# Altium PCB board_1_ver2.PcbDoc
Units mil, origin at the board's own origin, x right, y up, seen from the top; angles counter-clockwise.
Board outline 3543.31 x 1968.5 mil, 2 copper layers (Top Layer, Bottom Layer); 85 components, 75 nets, 306 pads, 106 vias.
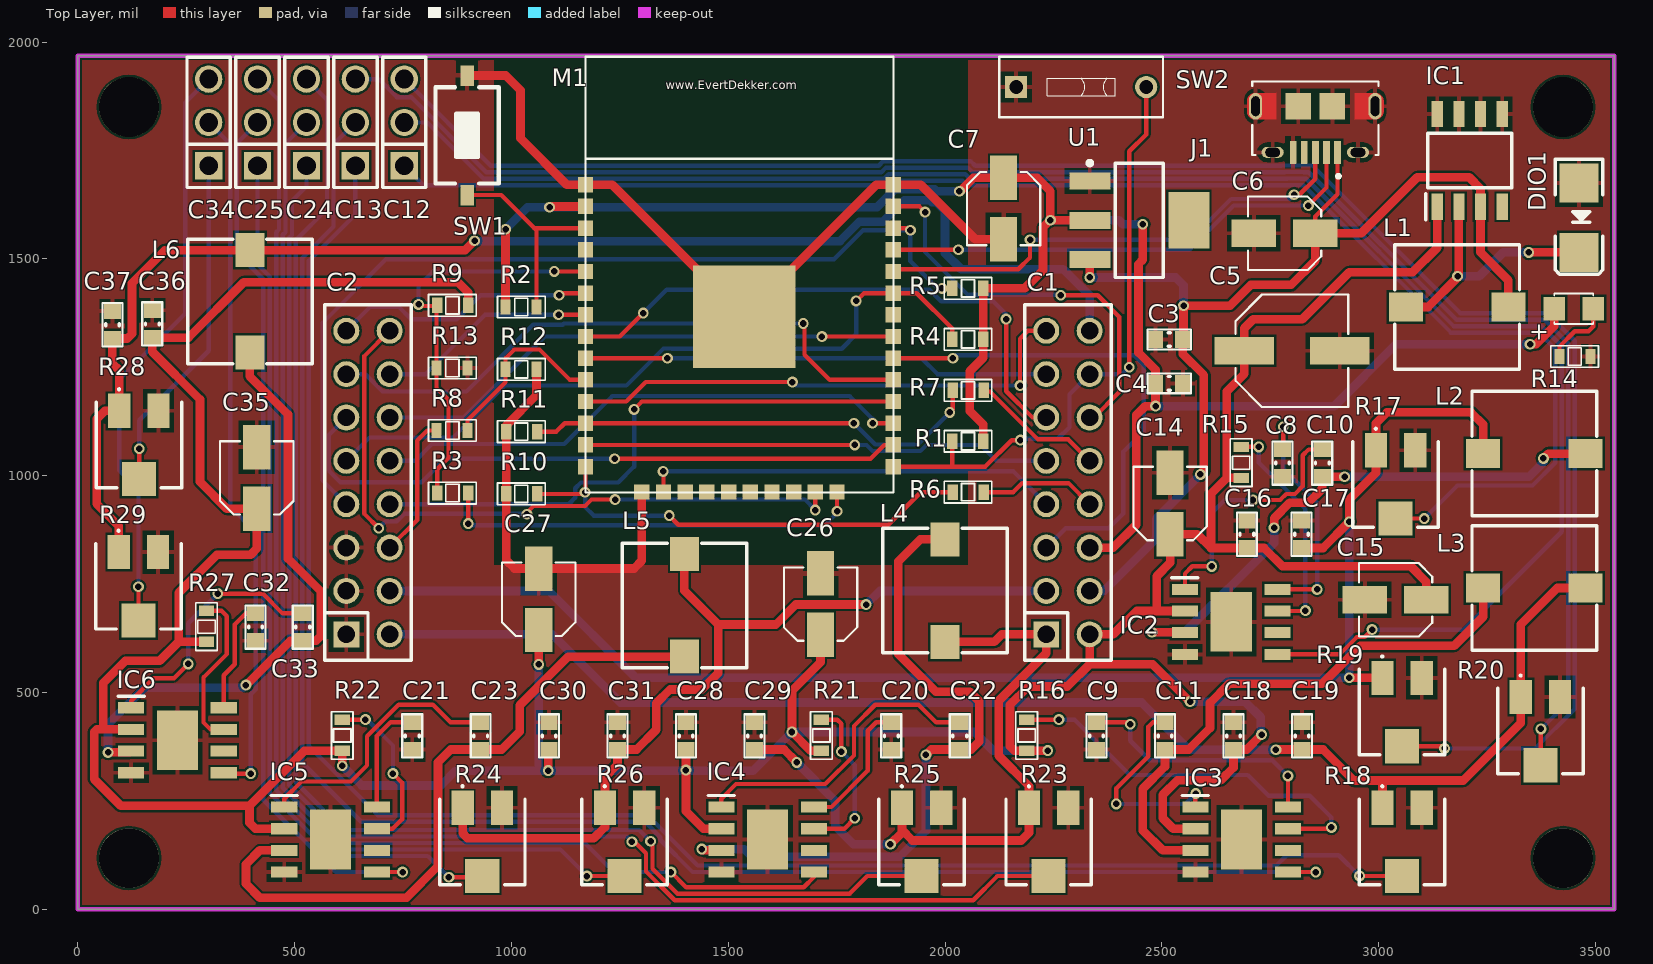
[diagram p0: Top Layer view]
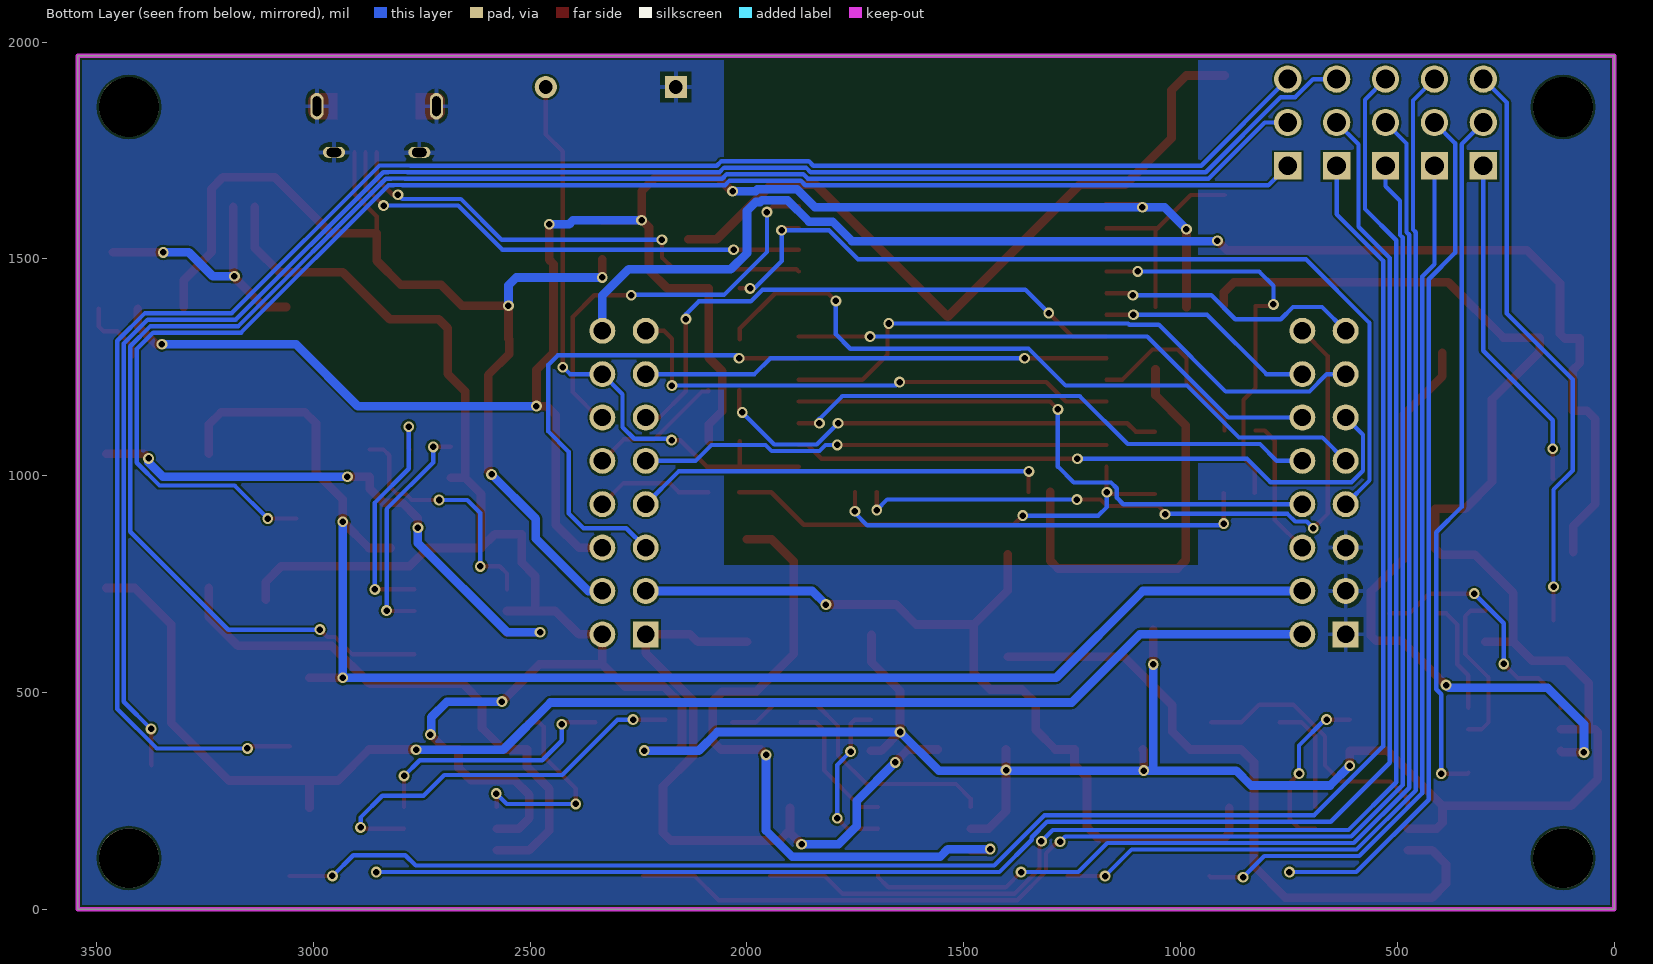
[diagram p1: Bottom Layer view, seen from below]
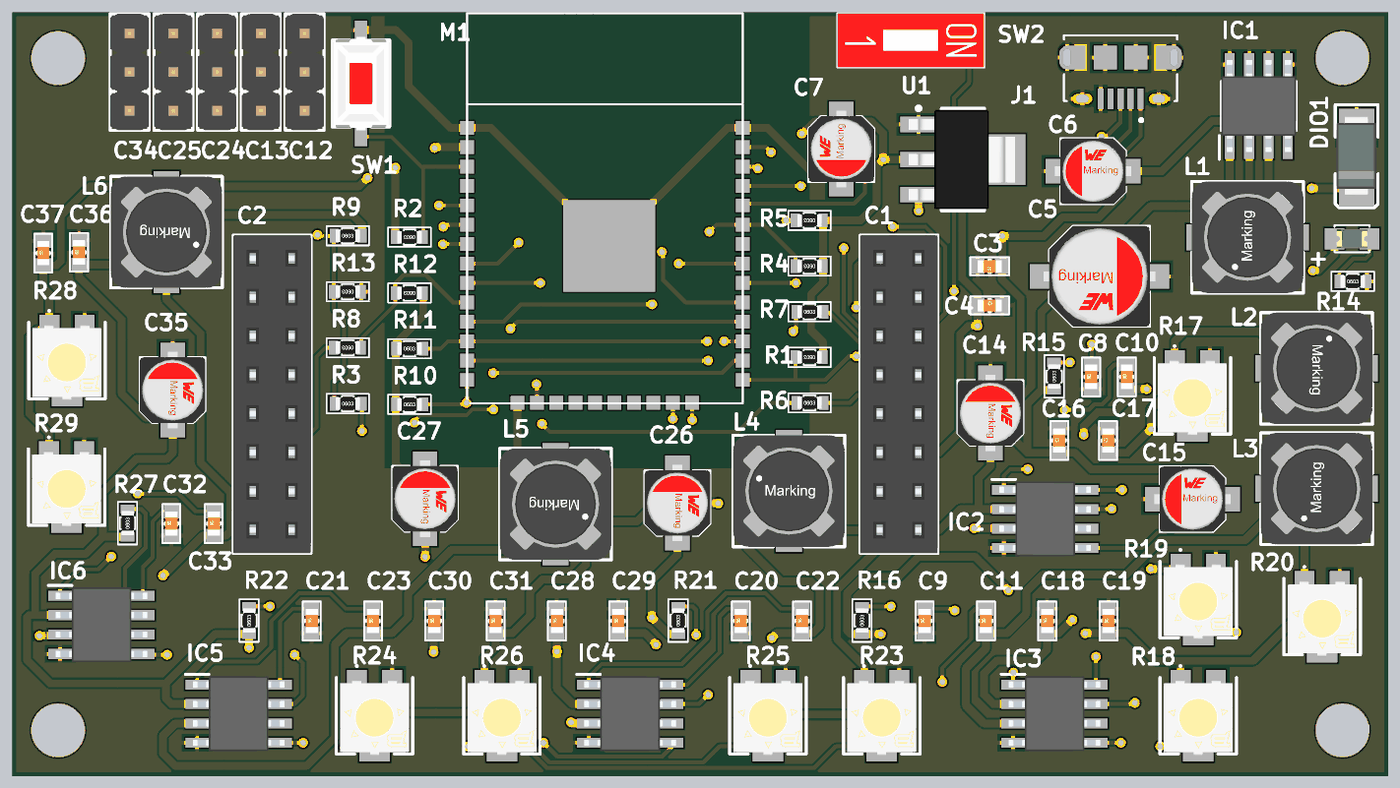
[diagram p2: 3D render of the assembled board from above, using the file's embedded part models]

## Layer stack, top to bottom
Top Solder: solder mask 0.4, Solder Resist, Dk 3.5
Top Layer: signal copper 1.4
Dielectric 1: dielectric 12.6, FR-4, Dk 4.8
Bottom Layer: signal copper 1.4
Bottom Solder: solder mask 0.4, Solder Resist, Dk 3.5

## Board outline
0,0 3543.31,0 3543.31,1968.5 0,1968.5

## Design rules (kind name [scope] priority, off if disabled: settings)
Clearance [All] p1: gap=5
PolygonConnect [All] p1: connectstyle=Relief reliefconductorwidth=10 reliefentries=4 polygonreliefangle="90 Angle" airgapwidth=10
RoomDefinition power [InComponentClass('power')] p1: confinementstyle=ConfineIn formatcopy=TRUE lockcomponents=FALSE outline 3589,1243 6248,1243 6248,1729 3589,1729
RoomDefinition esp32 [InComponentClass('esp32')] p2: confinementstyle=ConfineIn formatcopy=TRUE lockcomponents=FALSE outline 3589,55 7698,55 7698,1194 3589,1194
RoutingVias [All] p1: holewidth=15 width=25 viastyle="Through Hole" minholewidth=15 minwidth=25 maxholewidth=28 maxwidth=50
SolderMaskExpansion [All] p1: expansion=4
Width [All] p1: maxlimit=100 minlimit=6 preferedwidth=10
30 further rules are at their usual default settings.

## Classes and differential pairs
component class esp32: C1 C2 J1 M1 R1 R2 R3 R4 R5 R6 R7 R8 R9 R10 R11 R12 R13 SW1 SW2
component class power: + C3 C4 C5 C6 C7 DIO1 IC1 IC3 L1 R14 U1 U2 U3 U4

## Components (designator, comment, footprint, x,y, rotation, side; value= is the part's Value field where it differs from the comment)
+ "LED" LED-0805-Blue 3405,1385 r0 top (schematic designator LED1)
C1 "JP8x2" JP8-C2T 2283.46,984.25 r90 top locked
C2 "JP8x2" JP8-C2T 669.29,984.25 r90 top locked
C3 "10uF" CN-SMD-0603 2517,1314 r180 top
C4 "10uF" CN-SMD-0603 2517,1213 r0 top
C5 "470uF" CAP-ALU-SMD-6.3x7.7x2.2 2800,1288 r0 top
C6 "CN-ALU-SMD" CAP-ALU-SMD-4.5x5x1.4 2783,1559 r180 top
C7 "CN-ALU-SMD" CAP-ALU-SMD-4.5x5x1.4 2135,1616 r270 top
C8 "0.1uF" CN-SMD-0603 2778.27,1029.01 r90 top
C9 "0.1uF" CN-SMD-0603 2349.54,400.01 r90 top
C10 "10nF" CN-SMD-0603 2870,1029.01 r90 top
C11 "10nF" CN-SMD-0603 2507.36,400.01 r90 top
C12 "JP3" JP3-D1T 753,1714.57 r90 top
C13 "JP3" JP3-D1T 640.25,1714.57 r90 top
C14 "CN-ALU-SMD" CAP-ALU-SMD-4.5x5x1.4 2519,936 r90 top
C15 "CN-ALU-SMD" CAP-ALU-SMD-4.5x5x1.4 3039,714 r180 top
C16 "10uF" CN-SMD-0603 2696,865 r90 top
C17 "10uF" CN-SMD-0603 2822,865 r90 top
C18 "10uF" CN-SMD-0603 2665.18,400.01 r90 top
C19 "10uF" CN-SMD-0603 2823,400.01 r90 top
C20 "0.1uF" CN-SMD-0603 1876.09,400.01 r90 top
C21 "0.1uF" CN-SMD-0603 771.36,400.01 r90 top
C22 "10nF" CN-SMD-0603 2033.91,400.01 r90 top
C23 "10nF" CN-SMD-0603 929.18,400.01 r90 top
C24 "JP3" JP3-D1T 527.5,1714.57 r90 top
C25 "JP3" JP3-D1T 414.75,1714.57 r90 top
C26 "CN-ALU-SMD" CAP-ALU-SMD-4.5x5x1.4 1713,704 r90 top
C27 "CN-ALU-SMD" CAP-ALU-SMD-4.5x5x1.4 1063,715 r90 top
C28 "10uF" CN-SMD-0603 1402.63,400.01 r90 top
C29 "10uF" CN-SMD-0603 1560.45,400.01 r90 top
C30 "10uF" CN-SMD-0603 1087,400.01 r90 top
C31 "10uF" CN-SMD-0603 1244.82,400.01 r90 top
C32 "0.1uF" CN-SMD-0603 409.77,651.01 r90 top
C33 "10nF" CN-SMD-0603 519,651.01 r90 top
C34 "JP3" JP3-D1T 302,1714.57 r90 top
C35 "CN-ALU-SMD" CAP-ALU-SMD-4.5x5x1.4 413,995 r90 top
C36 "10uF" CN-SMD-0603 172,1350 r90 top
C37 "10uF" CN-SMD-0603 80,1348 r90 top
DIO1 "SS34" DIO-SMD-106 3462,1595 r90 top
IC1 "XL1509-5.0E1" SOIC127P600X175-8N 3210,1727 r90 top
IC2 "FR9888SPGTR" SOIC127P600X170-9N 2660,663 r0 top
IC3 "FR9888SPGTR" SOIC127P600X170-9N 2684,161 r0 top
IC4 "FR9888SPGTR" SOIC127P600X170-9N 1591,161 r0 top
IC5 "FR9888SPGTR" SOIC127P600X170-9N 583,161 r0 top
IC6 "FR9888SPGTR" SOIC127P600X170-9N 230,390 r0 top
J1 "10118194-0001LF" AMPHENOL_10118194-0001LF 2854,1852 r180 top
L1 "1.0 μH" L-SMD-M-7.3x4.5 3181,1389 r270 top
L2 "1.0 μH" L-SMD-M-7.3x4.5 3359,1051 r90 top
L3 "1.0 μH" L-SMD-M-7.3x4.5 3359,741 r270 top
L4 "1.0 μH" L-SMD-M-7.3x4.5 2000,735 r180 top
L5 "1.0 μH" L-SMD-M-7.3x4.5 1399,701 r0 top
L6 "1.0 μH" L-SMD-M-7.3x4.5 397,1402 r0 top
M1 "ESP32S_Module" ESP32S 1171,961 r0 top
R1 "10K" RES-SMD-0603 2053,1079.5 r180 top
R2 "10K" RES-SMD-0603 1022.99,1389 r180 top
R3 "0R" RES-SMD-0603 864.01,960 r0 top
R4 "4K7" RES-SMD-0603 2053,1314.5 r180 top
R5 "4K7" RES-SMD-0603 2053,1432 r180 top
R6 "1K" RES-SMD-0603 2053.01,962 r0 top
R7 "1K" RES-SMD-0603 2053.01,1197 r0 top
R8 "1K" RES-SMD-0603 864,1104.25 r180 top
R9 "10K" RES-SMD-0603 864.01,1392.75 r0 top
R10 "2K" RES-SMD-0603 1023,958 r0 top
R11 "2K" RES-SMD-0603 1023,1101.67 r0 top
R12 "2K" RES-SMD-0603 1022.99,1245.33 r180 top
R13 "1K" RES-SMD-0603 864,1248.5 r180 top
R14 "1K" RES-SMD-0603 3452,1275 r0 top
R15 "100K" RES-SMD-0603 2683,1030 r90 top
R16 "100K" RES-SMD-0603 2188.18,401 r90 top
R17 "3314J-2-504E" 3314J-1 3039,980 r0 top
R18 "3314J-2-504E" 3314J-1 3054,155.54 r0 top
R19 "3314J-2-504E" 3314J-1 3054,455 r0 top
R20 "3314J-2-504E" 3314J-1 3373,411 r0 top
R21 "100K" RES-SMD-0603 1714.73,401 r90 top
R22 "100K" RES-SMD-0603 610,401 r90 top
R23 "3314J-2-504E" 3314J-1 2239,155.54 r0 top
R24 "3314J-2-504E" 3314J-1 933,155.54 r0 top
R25 "3314J-2-504E" 3314J-1 1946,155.54 r0 top
R26 "3314J-2-504E" 3314J-1 1261,155.54 r0 top
R27 "100K" RES-SMD-0603 297,652 r90 top
R28 "3314J-2-504E" 3314J-1 141,1071 r0 top
R29 "3314J-2-504E" 3314J-1 140,745 r0 top
SW1 "Reset" SW1-SMD 898,1785 r90 top
SW2 "Flash" SW-DIP1-1 2314,1896.32 r270 top
U1 "LM1117-3.3V" SOT223 2448,1589 r270 top

## Footprints (in the part's own frame and the unit in brackets; to place one, negate y for a bottom-side part, rotate by r counter-clockwise, add the part's x,y. Pads: shape width x height; smd on the part's side, far side on the other; paste and mask are expansions set on the pad)
3314J-1 [mm]
  rect 1.3x2 smd: 1(-1.15,2) 3(1.15,2)
  rect 2x2 smd: 2(0,-2)
  silkscreen extent -2.5,-2.5 2.5,3.28, body extent -2.25,-2.61 2.25,2.36, height 2.55
AMPHENOL_10118194-0001LF [mm]
  rect 0.4x1.35 smd: 1(-1.3,2.7) 2(-0.65,2.7) 3(0,2.7) 4(0.65,2.7) 5(1.3,2.7)
  oval 1.3x0.65 hole 0.55 slot 0.85 at 0 deg: S1(-2.5,2.7) S2(2.5,2.7)
  oval 0.775x1.55 hole 0.5 slot 1.15 at 90 deg: S3(-3.5,0) S6(3.5,0)
  rect 1.5x1.55 smd: S4(-1,0) S5(1,0)
  Top Layer region: 193 vertices and 0 holes, not listed, extent -4,-0.775 -2.3,0.78
  Top Layer region: 193 vertices and 0 holes, not listed, extent 2.3,-0.78 4,0.775
  silkscreen extent -3.7,-1.45 3.7,4.2
CAP-ALU-SMD-4.5x5x1.4 [mm]
  rect 2.6x1.6 smd: 1(-1.8,0) 2(1.8,0)
  silkscreen extent -2.15,-2.15 2.15,2.15, body extent -2.5,-2.15 2.5,2.15, height 5.45
CAP-ALU-SMD-6.3x7.7x2.2 [mm]
  rect 3.5x1.6 smd: 1(-2.8,0) 2(2.8,0)
  silkscreen extent -3.3,-3.3 3.3,3.3, body extent -3.65,-3.3 3.65,3.3, height 7.65
CN-SMD-0603 [mm]
  rect 0.9x1 smd: 1(-0.8,0) 2(0.8,0)
  silkscreen extent -1.27,-0.58 1.27,0.58, body extent -0.8,-0.4 0.8,0.4, height 0.3
DIO-SMD-106 [mil]
  rect 90x90.55 smd: 1(80,0) 2(-80,0)
  silkscreen extent -130,-55 135,55, body extent -99,-50 106,52, height 95
ESP32S [mm] "ESP32S-Module"
  rect 0.9x0.9 smd: 1(0,18.034) 2(0,16.764) 3(0,15.494) 4(0,14.224) 5(0,12.954) 6(0,11.684) 7(0,10.414) 8(0,9.144) 9(0,7.874) 10(0,6.604) 11(0,5.334) 12(0,4.064) 13(0,2.794) 14(0,1.524) 15(3.3,0.034) 16(4.57,0.034) 17(5.84,0.034) 18(7.11,0.034) 19(8.38,0.034) 20(9.65,0.034) 21(10.92,0.034) 22(12.19,0.034) 23(13.46,0.034) 24(14.73,0.034) 25(18.034,1.524) 26(18.034,2.794) 27(18.034,4.064) 28(18.034,5.334) 29(18.034,6.604) 30(18.034,7.874) 31(18.034,9.144) 32(18.034,10.414) 33(18.034,11.684) 34(18.034,12.954) 35(18.034,14.224) 36(18.034,15.494) 37(18.034,16.764) 38(18.034,18.034)
  rect 6x6 smd: 101(9.3,10.3)
  silkscreen extent 0,0 18.03,25.53, body extent 0,0 18.03,25.53, height 2
JP3-D1T [mm] "3 pins, 1 row, straight, gold plating"
  rect 1.6x1.6 hole 1.1: 1(0,0)
  round 1.6 hole 1.1: 2(2.54,0) 3(5.08,0)
  silkscreen extent -1.27,-1.27 6.35,1.27, body extent -1.27,-1.27 6.35,1.27, height 8.54
JP8-C2T [mm] "16 pins, dual row, straight, gold plating"
  rect 1.52x1.52 hole 1.02: 1(-8.89,1.27)
  round 1.52 hole 1.02: 2(-6.35,1.27) 3(-3.81,1.27) 4(-1.27,1.27) 5(1.27,1.27) 6(3.81,1.27) 7(6.35,1.27) 8(8.89,1.27) 9(8.89,-1.27) 10(6.35,-1.27) 11(3.81,-1.27) 12(1.27,-1.27) 13(-1.27,-1.27) 14(-3.81,-1.27) 15(-6.35,-1.27) 16(-8.89,-1.27)
  silkscreen extent -10.41,-2.54 10.41,2.54, body extent -10.41,-2.54 10.41,2.54, height 8.51
L-SMD-M-7.3x4.5 [mm] "WE-PDA SMD Shielded Power Inductor, 7345"
  rect 1.7x2 smd: 1(0,3) 2(0,-3)
  silkscreen extent -3.65,-3.65 3.65,3.65, body extent -3.65,-3.65 3.65,3.65, height 4.05
LED-0805-Blue [mil]
  rect 50x55 smd: 1(0,0) 2(90,0)
  silkscreen extent 0,-35 90,35, body extent 5,-25 85,25, height 43
RES-SMD-0603 [mm]
  rect 0.6x0.9 smd: 1(-0.889,0) 2(0.927,0)
  silkscreen extent -1.4,-0.64 1.4,0.64, body extent -0.8,-0.4 0.8,0.4, height 0.43
SOIC127P600X170-9N [mm]
  rect 1.525x0.65 smd: 1(-2.712,1.905) 2(-2.712,0.635) 3(-2.712,-0.635) 4(-2.712,-1.905) 5(2.712,-1.905) 6(2.712,-0.635) 7(2.712,0.635) 8(2.712,1.905)
  rect 2.41x3.5 smd: 9(0,0)
  silkscreen extent -3.47,2.58 -1.95,2.58, body extent -3,-2.45 3,2.45, height 1.7
SOIC127P600X175-8N [mm]
  rect 1.525x0.65 smd: 1(-2.712,1.905) 2(-2.712,0.635) 3(-2.712,-0.635) 4(-2.712,-1.905) 5(2.712,-1.905) 6(2.712,-0.635) 7(2.712,0.635) 8(2.712,1.905)
  silkscreen extent -3.47,-2.45 1.6,2.58, body extent -3,-2.45 3,2.45, height 1.75
SOT223 [mm]
  rect 1x2.4 smd: 1(-2.3,-2.9) 2(0,-2.9) 3(2.3,-2.9)
  rect 3.3x2.4 smd: 4(0,2.9)
  silkscreen extent -3.47,-3.02 3.35,1.4, body extent -3.25,-3.56 3.25,3.4, height 1.68
SW1-SMD [mm]
  rect 1.2x0.8 smd: 1(-3.5,0) 2(3.5,0)
  silkscreen extent -2.82,-1.85 2.82,1.85, body extent -3.05,-1.85 3.05,1.85, height 2.5
SW-DIP1-1 [mm] "01p, 2.54mm Pitch, Horizontal, Box Type, THT, flat Actuator, red, without Tape, Tube"
  rect 1.3x1.3 hole 0.8: 1(0,-3.81)
  round 1.3 hole 0.8: 2(0,3.81)
  silkscreen extent -1.77,-4.8 1.77,4.8, body extent -1.77,-4.8 1.77,4.8, height 5.4

## Part data
+: library part "LED SMD"
C1 C2: "WR-PHD 2.54 mm Dual Socket Header"
C3 C4 C8 C9 C10 C11 C16 C17 C18 C19 C20 C21 C22 C23 C28 C29 C30 C31 C32 C33 C36 C37: library part CN, "Tu gom"
C5: library part CN-ALU-SMD, "Polarized Capacitor (Axial)"
C6 C7 C14 C15 C26 C27 C35: "Polarized Capacitor (Axial)"
C12 C13 C24 C25 C34: "WR-PHD 2.54 mm Angled Socket Header"
DIO1: library part "Diode SMD", "Default Diode"
IC1 IC2 IC3 IC4 IC5 IC6: "Integrated Circuit"
J1: "USB - micro B USB 2.0 Receptacle Connector 5 Position Surface Mount, Right Angle; Through Hole"
L1 L2 L3 L4 L5 L6: library part L-SMD-1
M1: "Esp-32S"
R1 R2 R3 R4 R5 R6 R7 R8 R9 R10 R11 R12 R13 R14 R15 R16 R21 R22 R27: library part Res-SMD, "Resistor"
R17 R18 R19 R20 R23 R24 R25 R26 R28 R29: "Resistor"
SW1 SW2: library part SW2, "Switch button 2 pin"
U1: library part LM1117, "800mA Low-Dropout Linear Regulator"

## Free pads (board coordinates)
  round 137.8 hole 137.8: 0(118.11,118.11) 0(118.11,1850.39) 0(3425.2,118.11) 0(3425.2,1850.39)

## Via types
v1: diameter 25, hole 15, Top Layer to Bottom Layer, 106 vias

## Nets (pads, with @x,y where several pads share a name; then routed paths per layer and width w, separated by ;. In a path a pad name is that pad's centre, name@x,y a point inside that pad or via, vN(x,y) a via of type N, cw(c..) or ccw(c..) an arc to the next point about the centre after c; other vN are vias at no path point)
3V3: +.1 C1.14 C4.1 C7.1 M1.2 R1.1 R2.2 R4.1 R5.1 U1.2 | length 4527.4
  Top Layer w20: R2.2 v1(986.51,1568.51) ; v1(1088,1619) 1090,1621 M1.2 ; v1(2033,1656) 2035,1656 2065.87,1686.87 C7.1 2212.13,1686.87 2243,1656 v1(2243,1589) ; R1.1 2088,1118 2057,1149 2057,1241 2088,1272 R4.1 R5.1 2184,1432 2226,1474 2226,1573 2242,1589 v1(2243,1589) ; C1.14 2388.25,834.25 2441,887 2441,1140 2461.5,1160.5 v1(2485.5,1160.5) C4.1 2485.5,1244.5 2446,1284 2446,1488 2456,1498 v1(2456,1580) ; U1.2 v1(2243,1589) ; v1(3349,1303) 3363,1303 3405,1345 +.1
  Bottom Layer w20: v1(986.51,1568.51) 1037,1619 v1(1088,1619) 1843,1619 1884.5,1660.5 1975.75,1660.5 1980.25,1656 v1(2033,1656) ; v1(2243,1589) 2401,1589 2410,1580 v1(2456,1580) ; v1(2485.5,1160.5) 2897.5,1160.5 3040,1303 v1(3349,1303)
5V: C1.15 C3.1 C6.1 IC1.3 J1.1 L1.1 U1.3 | length 2481.7
  Top Layer w10: C6.1 2853.87,1597.87 2905.18,1649.18 J1.1
  Top Layer w20: v1(2333.83,1457.17) U1.3 ; v1(2589,1003) 2597,1011 2597,1232 2548.5,1280.5 C3.1 2550,1315.5 v1(2550,1392) 2657,1392 2705,1440 2798,1440 2853.87,1495.87 C6.1 2960,1559 3089,1688 3209,1688 3235,1662 IC1.3 3235,1515 3299.11,1450.89 L1.1
  Bottom Layer w20: C1.15 2366.25,734.25 2487,855 2487,901 v1(2589,1003) ; v1(2333.83,1457.17) 2531.83,1457.17 2550,1439 v1(2550,1392)
5V_1: C2.15 C17.1 L2.1 R17.1 R19.1 | length 3456.1
  Top Layer w20: C17.1 2871.5,833.5 v1(2932,894) 2932,945 2993.72,1006.72 R17.1 2993.72,1120.72 3019,1146 3213,1146 3240.89,1118.11 L2.1 ; v1(2932,534) 2932.26,533.74 R19.1
  Bottom Layer w20: C2.15 1086.75,734.25 1287,534 v1(2932,534) v1(2932,894)
5V_2: C2.16 C19.1 L3.1 R18.1 R20.1 | length 3277.6
  Top Layer w20: v1(2763,368) 2763.52,368.52 C19.1 2871.48,368.52 2942.72,297.28 3008.72,297.28 ; R18.1 3008.72,297.28 ; L3.1 3412,741 3327.72,656.72 R20.1 3327.72,429.72 3195.28,297.28 3008.72,297.28
  Bottom Layer w20: C2.16 1093.75,634.25 1251,477 2453,477 2562,368 v1(2763,368)
5V_3: C1.1 C29.1 L4.1 R23.1 R25.1 | length 1616.2
  Top Layer w20: C29.1 1628.48,368.52 v1(1658,339) ; v1(1874,150) 1900.72,176.72 1900.72,183.28 ; R25.1 1900.72,183.28 ; L4.1 2113.89,616.89 2131.25,634.25 C1.1 2233.46,590.46 2124,481 2124,354 2193.72,284.28 R23.1 2193.72,176.72 2176,159 1925,159 1900.72,183.28
  Bottom Layer w20: v1(1658,339) 1747,250 1747,192 1789,150 v1(1874,150)
5V_4: C1.2 C31.1 L5.1 R24.1 R26.1 | length 2029.1
  Top Layer w20: R24.1 887.72,175.28 899,164 1190,164 1215.72,189.72 R26.1 1215.72,304.72 1244.82,333.82 C31.1 1288.52,368.52 1334,414 1334,475 1366,507 1439,507 1477,545 1477,657 ; L5.1 1399,735 1477,657 ; v1(1818,703) 1656,703 1610,657 1477,657
  Bottom Layer w20: v1(1818,703) 1849.25,734.25 C1.2
5V_5: C1.9 C37.1 L6.1 R28.1 R29.1 | length 3245.7
  Top Layer w20: R29.1 94.72,884.28 44,935 44,1131 62.74,1149.74 R28.1 95.72,1243.28 80,1259 C37.1 114.5,1316.5 125,1327 125,1444 201.11,1520.11 L6.1 893.11,1520.11 v1(915,1542)
  Bottom Layer w20: v1(915,1542) 915.99,1541.01 1757.72,1541.01 1802.72,1586 1857,1586 1906.5,1635.5 1965.39,1635.5 1969.89,1631 1980,1631 2000,1611 2000,1513.11 2037.11,1476 2273,1476 2333.46,1415.54 C1.9
12V: C1.16 C5.1 C14.1 C15.1 C16.1 C18.1 C26.1 C27.1 C28.1 C30.1 C35.1 C36.1 IC1.1 IC2.2 IC3.2 IC4.2 IC5.2 IC6.2 R9.2 R15.1 R16.1 R21.1 R22.1 R27.1 | length 9554.4
  Top Layer w20: IC6.2 59,415 ; R27.1 233,617 ; IC5.2 410,186 396,200 396,239 ; v1(610,331) R22.1 523,366 396,239 ; R9.2 900.49,1422.51 877,1446 383,1446 255.5,1318.5 C36.1 172,1286 282,1176 282,986 343.87,924.13 C35.1 413,832 399,818 321,818 233,730 233,617 ; v1(1063,565) C27.1 ; v1(1085,320) 1085,366.52 C30.1 ; C28.1 v1(1402.63,321) 1402.63,226.37 1443,186 IC4.2 ; C26.1 1713,570 1647,504 v1(1647,409) 1690,366 R21.1 ; v1(2237,366) R16.1 2160,366 2150,376 2150,471.64 2192.36,514 2282,514 2333.46,565.46 ; IC2.2 2488,688 ; v1(2565,479) 2478.54,565.46 2333.46,565.46 ; IC3.2 2526,186 2502,210 2502,264 2536,298 2636,298 2665.18,327.18 C18.1 2695.52,368.52 v1(2730,403) ; R15.1 2650,995 ; C15.1 3109.87,755.13 3074,791 2778,791 2735.5,833.5 C16.1 2613.5,833.5 ; IC1.1 3135,1526 3078,1469 2932,1469 2824,1361 2711,1361 2689.76,1339.76 C5.1 2689.76,1234.76 2650,1195 2650,995 ; 59,415 59,522 110,573 189,573 233,617 ; 59,415 44,415 38,409 38,300 99,239 396,239 ; 2333.46,565.46 C1.16 2388.25,634.25 2442,688 2488,688 ; 2488,688 2488,768 2519,799 C14.1 2581.87,865.13 2613.5,833.5 ; 2613.5,833.5 2613.5,958.5 2650,995
  Bottom Layer w20: v1(610,331) 655.5,285.5 837.5,285.5 872,320 1065,320 ; v1(1063,565) 1063,322 1065,320 ; v1(2237,366) 2111,366 2068,409 v1(1647,409) 1558,320 v1(1085,320) 1065,320 ; v1(2565,479) 2692,479 2728,443 2728,401 v1(2730,403)
BTN_M1: C2.6 M1.26 | length 1487.4
  Top Layer w10: v1(1238,1039) 1828,1039 1860,1071 M1.26
  Bottom Layer w10: C2.6 579.37,1094.33 579.37,1011.63 606,985 793,985 847,1039 v1(1238,1039)
BTN_M2: C2.7 M1.29 | length 1437.4
  Top Layer w10: v1(1673,1351) 1676,1348 1676,1279 1734,1221 M1.29
  Bottom Layer w10: C2.7 662.83,1234.25 702.76,1194.33 896.33,1194.33 1050.5,1348.5 1118.32,1348.5 1120.82,1351 v1(1673,1351)
BTN_M3: C2.8 M1.6 | length 610.8
  Top Layer w10: v1(1110,1416) 1115,1421 M1.6
  Bottom Layer w10: C2.8 674.04,1389 741,1389 769,1361 874,1361 929,1416 v1(1110,1416)
BTN_M4: C2.9 M1.23 | length 1581.9
  Top Layer w10: v1(694,879) 661,912 661,1275.96 C2.9 ; v1(1036,911) 1036,915 1051.29,930.29 1170.11,930.29 1184.82,945 v1(1239,945) ; v1(1700.92,920.92) M1.23
  Bottom Layer w10: v1(694,879) 709.33,894.33 735.83,894.33 753.49,911.99 1035.01,911.99 v1(1036,911) ; v1(1239,945) 1676.84,945 v1(1700.92,920.92)
BTN_M5: C2.10 M1.7 | length 508.4
  Top Layer w10: v1(1109,1371) M1.7
  Bottom Layer w10: C2.10 802.25,1234.25 939,1371 v1(1109,1371)
BTN_M6: C1.6 M1.8 | length 1333
  Top Layer w10: M1.8 1250,1321 v1(1304,1375) ; v1(2141,1361) 2141,1195 2201.75,1134.25 C1.6
  Bottom Layer w10: v1(1304,1375) 1358,1429 1964.18,1429 1991.18,1402 2111,1402 2141,1372 v1(2141,1361)
BTN_M7: C1.7 M1.9 | length 1077.7
  Top Layer w10: M1.9 v1(1360,1271)
  Bottom Layer w10: v1(1360,1271) 1946,1271 1982.75,1234.25 C1.7
BTN_M8: C1.8 M1.11 | length 1202.5
  Top Layer w10: M1.11 1265,1171 1310,1216 v1(1648,1216) ; v1(2173,1208) 2173,1316 2191.25,1334.25 C1.8
  Bottom Layer w10: v1(1648,1216) 1656,1208 v1@2175.54,1208
BTN_M9: C1.10 M1.25 R1.2 SW2.2 | length 1404.4
  Top Layer w10: M1.25 2016,1021 ; R1.2 2016.51,1021.52 2016,1021 ; v1(2174,1082) 2154,1082 2093,1021 2016,1021 ; v1(2425,1250) 2425,1748 2464,1787 SW2.2
  Bottom Layer w10: v1(2174,1082) 2177,1085 2260,1085 2287,1112 2287,1187.79 C1.10 2408.25,1234.25 2424,1250 v1(2425,1250)
DS: C2.11 M1.31 | length 1239.1
  Top Layer w10: v1(1716,1321) M1.31
  Bottom Layer w10: C2.11 890.25,1134.25 1077,1321 v1(1716,1321)
DS_2: C2.12 M1.27 | length 1255.7
  Top Layer w10: v1(1833,1121) M1.27
  Bottom Layer w10: C2.12 778.25,1034.25 817,1073 1122,1073 1233,1184 1780,1184 1833,1131 v1(1833,1121)
GND: C2.1 C2.2 C2.3 C3.2 C4.2 C5.2 C6.2 C7.2 C8.1 C9.1 C14.2 C15.2 C16.2 C17.2 C18.2 C19.2 C20.1 C21.1 C26.2 C27.2 C28.2 C29.2 C30.2 C31.2 C32.1 C35.2 C36.2 C37.2 DIO1.1 IC1.5 IC1.6 IC1.7 IC1.8 IC2.4 IC2.9 IC3.4 IC3.9 IC4.4 IC4.9 IC5.4 IC5.9 IC6.4 IC6.9 J1.5 J1.S1 J1.S2 J1.S3 J1.S4 J1.S5 J1.S6 M1.1 M1.15 M1.38 M1.101 R10.1 R11.1 R12.1 R13.1 R14.2 R17.3 R18.3 R19.3 R20.3 R23.3 R24.3 R25.3 R26.3 R28.3 R29.3 SW1.2 SW2.1 U1.1 | length 2666.8
  Top Layer w20: SW1.2 987.2,1922.8 1021,1889 1021,1778 1128,1671 M1.1 1232.65,1671 M1.101 1841.63,1671 M1.38 1944,1671 2069.87,1545.13 C7.2 ; R12.1 1058,1186 988,1116 R11.1 R10.1 988,805 1007.13,785.87 C27.2 1282.87,785.87 1300.92,803.92 M1.15
IN_LED_1: C1.13 R6.2 | length 272.9
  Top Layer w10: R6.2 2157,962 2178,983 2284.72,983 C1.13
IN_LED_1_1: M1.14 R6.1 R10.2 | length 1101.6
  Top Layer w10: R10.2 1166,958 v1(1170,962) 1171,963 M1.14 ; v1(1364,908) 1385,887 1869,887 1944,962 R6.1
  Bottom Layer w10: v1(1170,962) 1170,928 1190,908 v1(1364,908)
IN_LED_2: C1.12 R7.2 | length 313
  Top Layer w10: R7.2 2089.49,1194.33 2103.67,1194.33 2214.28,1083.72 2284,1083.72 C1.12
IN_LED_2_1: M1.12 R7.1 R11.2 | length 1064.4
  Top Layer w10: R11.2 1103.67,1101.67 1123,1121 M1.12 v1(1790,1121) ; v1(2011,1146) 2018,1153 R7.1
  Bottom Layer w10: v1(1790,1121) 1839,1072 1937,1072 v1(2011,1146)
MODE_RUN: C2.14 R8.2 | length 327.3
  Top Layer w10: C2.14 783,897.96 783,1081 806.25,1104.25 R8.2
MODE_RUN_1: M1.10 R8.1 R12.2 | length 424.5
  Top Layer w10: R8.1 899,1128 986.51,1215.51 R12.2 986.51,1270.51 1007,1291 1065,1291 1135,1221 M1.10
MODE_SETUP: C1.11 M1.37 | length 946.4
  Top Layer w10: M1.37 1941,1621 v1(1954,1608) ; v1(2267,1416) 2352,1416 2402,1366 2402,1193 2343.25,1134.25 C1.11
  Bottom Layer w10: v1(1954,1608) 1954,1516 2053,1417 2266,1417 v1(2267,1416)
NetC8_2: C8.2 IC2.8 | length 551.7
  Top Layer w10: IC2.8 v1(2858,738) ; C8.2 2780,1062.24 v1(2780,1113)
  Bottom Layer w10: v1(2780,1113) 2780,1016 2858,938 v1(2858,738)
NetC9_2: C9.2 IC3.8 | length 586.5
  Top Layer w10: C9.2 2422.49,431.51 v1(2427,427) ; IC3.8 v1(2790.77,307.77)
  Bottom Layer w10: v1(2427,427) 2427,389 2472,344 2754.54,344 v1(2790.77,307.77)
NetC10_1: C10.1 IC2.3 L2.2 | length 1302.2
  Top Layer w20: v1(2477,639) 2552.23,639 IC2.3 ; v1(2759,880) 2759,902 2795,938 2838,938 2870,970 C10.1 v1(2921.52,997.52) ; v1(3380,1040) 3391,1051 L2.2
  Bottom Layer w20: v1(2477,639) 2553,639 2759,845 v1(2759,880) ; v1(2921.52,997.52) 3346.52,997.52 3380,1031 v1(3380,1040)
NetC10_2: C10.2 IC2.1 | length 585.2
  Top Layer w10: IC2.1 2553.23,774.23 2570,791 v1(2615,791) ; v1(2710,944) 2772.72,944 2786.72,958 2807,958 2825,976 2825,1047 2838.51,1060.51 C10.2
  Bottom Layer w10: v1(2615,791) 2615,914 2645,944 v1(2710,944)
NetC11_1: C11.1 IC3.3 L3.2 | length 1308.6
  Top Layer w20: IC3.3 2502,136 2456,182 2456,278 2507.36,329.36 C11.1 2561.52,368.52 2611,418 2611,476 2655,520 2870,520 2958,608 3174,608 3240.89,674.89 L3.2
NetC11_2: C11.2 IC3.1 | length 475.6
  Top Layer w10: v1(2395,243) 2395,279 2469,353 2469,421 2479.51,431.51 C11.2 ; IC3.1 2577.23,266.23 v1(2578,267)
  Bottom Layer w10: v1(2395,243) 2554,243 v1(2578,267)
NetC12_1: C12.1 R17.2 | length 3521.8
  Top Layer w10: R17.2 v1(3105.26,901.26)
  Bottom Layer w10: C12.1 797.57,1670 1865.72,1670 1876.22,1680.5 2040.32,1680.5 2050.82,1670 2795.18,1670 2795.68,1670.5 2814.32,1670.5 2814.82,1670 2826.57,1670 3166.57,1330 3369.36,1330 3407,1292.36 3407,1029.72 3354.8,977.52 3181.52,977.52 v1(3105.26,901.26)
NetC12_2: C12.2 IC2.5 | length 4091.9
  Top Layer w10: IC2.5 2909.72,588 2949.72,628 2968,628 v1(2985,645)
  Bottom Layer w10: C12.2 806.22,1814.57 935.79,1685 1859.5,1685 1870,1695.5 2046.53,1695.5 2057.03,1685 2788.97,1685 2789.47,1685.5 2820.53,1685.5 2821.03,1685 2832.79,1685 3172.79,1345 3375.57,1345 3422,1298.57 3422,871 3196,645 v1(2985,645)
NetC12_3: C12.3 R19.2 | length 4244.9
  Top Layer w10: R19.2 3146.74,376.26 v1(3152,371)
  Bottom Layer w10: C12.3 952.57,1715 1847.08,1715 1857.58,1725.5 2058.96,1725.5 2069.46,1715 2776.54,1715 2777.04,1715.5 2847.5,1715.5 3188,1375 3388,1375 3452,1311 3452,462.18 3360.82,371 v1(3152,371)
NetC13_1: C13.1 R18.2 | length 4047.7
  Top Layer w10: v1(2956,77) 3053.8,77 R18.2
  Bottom Layer w10: C13.1 640.25,1603.04 533,1495.79 533,376.18 692.18,217 1314.03,217 1430.03,101 2764,101 2788,125 2908,125 v1(2956,77)
NetC13_2: C13.2 IC3.5 | length 4036.2
  Top Layer w10: IC3.5 v1(2855,86)
  Bottom Layer w10: C13.2 590,1764.32 590,1574 518,1502 518,338 654,202 1307.82,202 1343.5,166.32 1343.5,160.5 1418,86 v1(2855,86)
NetC13_3: C13.3 R20.2 | length 4057.5
  Top Layer w10: R20.2 3374,333.26 v1(3374,416)
  Bottom Layer w10: C13.3 694.32,1914.57 735.81,1873.07 768.93,1873.07 942,1700 1853.29,1700 1863.79,1710.5 2052.75,1710.5 2063.25,1700 2782.75,1700 2783.25,1700.5 2826.75,1700.5 2827.25,1700 2839,1700 3179,1360 3381.79,1360 3437,1304.79 3437,479 v1(3374,416)
NetC20_2: C20.2 IC4.8 | length 313.2
  Top Layer w10: IC4.8 1738,236 1822,320 1822,412 1841.51,431.51 C20.2
NetC21_2: C21.2 IC5.8 | length 258.5
  Top Layer w10: IC5.8 689.77,399.77 721.51,431.51 C21.2
NetC22_1: C22.1 IC4.3 L4.2 | length 1573.4
  Top Layer w20: v1(1439,139) 1442,136 IC4.3 ; v1(1956,356) 1968.52,368.52 C22.1 2060.52,368.52 2079,387 2079,480 2057,502 1979,502 1892,589 1892,802 1943.11,853.11 L4.2
  Bottom Layer w20: v1(1439,139) 1537,139 1555,121 1895,121 1956,182 v1(1956,356)
NetC22_2: C22.2 IC4.1 | length 715.3
  Top Layer w10: IC4.1 1484.23,255.23 1518,289 1724,289 1790,355 1790,423 1839,472 1939,472 1979.49,431.51 C22.2
NetC23_1: C23.1 IC5.3 L5.2 | length 1576.7
  Top Layer w20: IC5.3 420,136 388,104 388,59 420,27 758,27 831,100 831,339 860.52,368.52 C23.1 977.52,368.52 1019,410 1019,471 1130.89,582.89 L5.2
NetC23_2: C23.2 IC5.1 | length 618
  Top Layer w10: IC5.1 476.23,255.23 516,295 630,295 667,332 667,399 740,472 819,472 859.49,431.51 C23.2
NetC24_1: C24.1 R23.2 | length 3353.1
  Top Layer w10: v1(1278,156) 1284,156 1310.37,129.63 1310.37,87.42 1376.79,21 2065,21 2120.8,76.8 R23.2
  Bottom Layer w10: C24.1 527.5,1667.5 494,1634 494,1555.21 488,1549.21 488,286.79 606.79,168 1266,168 v1(1278,156)
NetC24_2: C24.2 IC4.5 | length 2897.5
  Top Layer w10: v1(1368,86) 1403,51 1674,51 1697.77,74.77 IC4.5
  Bottom Layer w10: C24.2 479,1766.07 479,1561.43 473,1555.43 473,280.57 600.57,153 1169,153 1236,86 v1(1368,86)
NetC24_3: C24.3 R25.2 | length 3272
  Top Layer w10: v1(1321,157) 1325.37,152.63 1325.37,93.63 1383,36 1780,36 1820.8,76.8 R25.2
  Bottom Layer w10: C24.3 575,1867.07 575,1615 503,1543 503,293 613,183 1295,183 v1(1321,157)
NetC25_1: C25.1 R24.2 | length 2029.7
  Top Layer w10: v1(856,74) 930.2,74 R24.2
  Bottom Layer w10: C25.1 414.75,1487.46 443,1459.21 443,268.15 588.15,123 807,123 v1(856,74)
NetC25_2: C25.2 IC5.5 | length 2056
  Top Layer w10: IC5.5 v1(749,86)
  Bottom Layer w10: C25.2 367,1766.82 367,1514 428,1453 428,253 595,86 v1(749,86)
NetC25_3: C25.3 R26.2 | length 2547.9
  Top Layer w10: v1(1174.2,76.8) R26.2
  Bottom Layer w10: C25.3 464,1865.32 464,1567.64 458,1561.64 458,274.36 594.36,138 1113,138 v1(1174.2,76.8)
NetC32_2: C32.2 IC6.8 | length 260.8
  Top Layer w10: IC6.8 336.77,539.77 362,565 362,657 387.51,682.51 C32.2
NetC33_1: C33.1 IC6.3 L6.2 | length 1415.8
  Top Layer w20: v1(70,362) 120.23,362 IC6.3 ; v1(388,517) 490.52,619.52 C33.1 549.52,619.52 561,631 561,733 485,809 485,1141 397,1229 L6.2
  Bottom Layer w20: v1(70,362) 70,427 154,511 382,511 v1(388,517)
NetC33_2: C33.2 IC6.1 | length 588.1
  Top Layer w10: IC6.1 123.23,481.23 175,533 222,533 v1(255,566) ; v1(323,728) 427.02,728 472.51,682.51 C33.2
  Bottom Layer w10: v1(255,566) 255,660 v1(323,728)
NetC34_1: C34.1 R28.2 | length 789
  Top Layer w10: R28.2 142,993.26 v1(142,1062)
  Bottom Layer w10: v1(142,1062) 142,1128 302,1288 C34.1
NetC34_2: C34.2 IC6.5 | length 1614.3
  Top Layer w10: IC6.5 338.77,313 v1(399,313)
  Bottom Layer w10: C34.2 352,1764.57 352,928 410.5,869.5 410.5,507.68 399,496.18 v1(399,313)
NetC34_3: C34.3 R29.2 | length 1351.9
  Top Layer w10: R29.2 v1(140,744)
  Bottom Layer w10: v1(140,744) 140,968 96,1012 96,1222 248,1374 248,1860.57 C34.3
NetDIO1_2: DIO1.2 IC1.2 L1.2 | length 612.4
  Top Layer w20: L1.2 3114,1389 v1@3183.5,1458.5 ; v1@3185,1460 IC1.2 ; v1(3346,1515) DIO1.2
  Bottom Layer w20: v1(3182,1460) 3232,1460 3287,1515 v1(3346,1515)
NetIC2_7: IC2.7 R15.2 | length 527.2
  Top Layer w10: R15.2 v1(2723.49,1066.49) ; IC2.7 2830,688 v1(2831,689)
  Bottom Layer w10: v1(2723.49,1066.49) 2723.49,1030.51 2831,923 v1(2831,689)
NetIC3_7: IC3.7 R16.2 | length 920.7
  Top Layer w10: R16.2 v1(2262.51,437.49) ; IC3.7 2888,186 v1(2891,189)
  Bottom Layer w10: v1(2262.51,437.49) 2298.51,437.49 2426,310 2698,310 2746,262 2841,262 2891,212 v1(2891,189)
NetIC4_7: IC4.7 R21.2 | length 385.2
  Top Layer w10: IC4.7 1768,186 v1(1792,210) ; R21.2 1751.51,437.49 1761,428 v1(1761,364)
  Bottom Layer w10: v1(1761,364) 1792,333 v1(1792,210)
NetIC5_7: IC5.7 R22.2 | length 387.7
  Top Layer w10: R22.2 v1(663.49,437.49) ; IC5.7 726,186 748,208 748,292 v1(727,313)
  Bottom Layer w10: v1(663.49,437.49) 667.51,437.49 727,378 v1(727,313)
NetIC6_7: IC6.7 R27.2 | length 372.9
  Top Layer w10: R27.2 331.51,688.49 344,676 344,589 290,535 290,431 306,415 IC6.7
NetLED1_2: +.2 R14.1 | length 161.1
  Top Layer w10: R14.1 3417,1298 3452,1333 3484,1333 3495,1344 +.2
NetM1_3: M1.3 R2.1 SW1.1 | length 488.6
  Top Layer w10: SW1.1 976.8,1647.2 1053,1571 ; R2.1 1058,1566 1053,1571 ; M1.3 1053,1571
NetM1_24: M1.24 R3.2 | length 985.9
  Top Layer w10: v1(900.49,889.49) R3.2 ; M1.24 1750.92,918.08 v1(1751,918)
  Bottom Layer w10: v1(900.49,889.49) 904.49,885.5 1722.5,885.5 v1@1751,914 ; v1@1751,911 v1@1751,914 ; v1(1751,918) v1@1751,914
PIN_VOL: M1.5 R3.1 R9.1 R13.2 | length 938.1
  Top Layer w10: v1(786,1395) 789.74,1391.26 827.51,1391.26 R13.2 827.51,1202.49 855,1175 855,1041 829,1015 R3.1 ; v1(1099,1471) M1.5
  Bottom Layer w10: v1(786,1395) 786,1438 819,1471 v1(1099,1471)
RX_1: J1.2 M1.35 | length 1139.2
  Top Layer w10: M1.35 v1(2031,1521) ; v1(2838,1623) 2879.59,1664.59 J1.2
  Bottom Layer w10: v1(2031,1521) 2564,1521 2666,1623 v1(2838,1623)
SCL: C2.4 M1.36 R5.2 | length 2119.7
  Top Layer w10: M1.36 1915,1571 v1(1920,1566) ; v1(1993,1432) R5.2
  Bottom Layer w10: C2.4 564.37,989.17 564.37,1352.37 711,1499 1744,1499 1811,1566 v1(1920,1566) 1920,1495 1983,1432 v1(1993,1432)
SDA: C2.5 M1.33 R4.2 | length 1661.7
  Top Layer w10: v1(1795,1403) 1813,1421 M1.33 1935,1421 2016.51,1339.49 R4.2
  Bottom Layer w10: C2.5 673.04,1088 865.21,1088 985.21,1208 1265.18,1208 1350.68,1293.5 1369.32,1293.5 1369.83,1293 1762,1293 1795,1326 v1(1795,1403)
SH_CP: C1.3 M1.30 | length 1161.6
  Top Layer w10: M1.30 v1(2018,1271)
  Bottom Layer w10: v1(2018,1271) 2025,1278 2436,1278 2458,1256 2458,1102 2411,1055 2411,913 2377,879 2278.21,879 C1.3
SH_CP_2: C1.5 M1.13 | length 1089.3
  Top Layer w10: M1.13 v1(1792,1071)
  Bottom Layer w10: v1(1792,1071) 1818.78,1071 1832.79,1057 1943.21,1057 1957.22,1071 2082,1071 2118.75,1034.25 C1.5
ST_CP: C2.13 M1.28 | length 1349.9
  Top Layer w10: v1(1283,1153) 1301,1171 M1.28
  Bottom Layer w10: C2.13 1132.25,934.25 1147.5,949.5 1147.5,971.32 1160.68,984.5 1246.5,984.5 1283,1021 v1(1283,1153)
ST_CP_2: C1.4 M1.16 | length 962.9
  Top Layer w10: v1(1350,1010) 1350.92,1009.08 M1.16
  Bottom Layer w10: v1(1350,1010) 2157.72,1010 C1.4
TX_1: J1.3 M1.34 | length 1146.4
  Top Layer w10: M1.34 1886,1476 2169,1476 2196,1503 v1(2196,1544) ; v1(2805,1648) 2817,1648 2854,1685 J1.3
  Bottom Layer w10: v1(2196,1544) 2565.79,1544 2659.79,1638 2795,1638 v1(2805,1648)
pads on no net: IC1.4 IC2.6 IC3.6 IC4.6 IC5.6 IC6.6 J1.4 M1.4 M1.17 M1.18 M1.19 M1.20 M1.21 M1.22 M1.32 U1.4

## Polygon pours and split planes (outlines as drawn)
GND on Top Layer "Top Layer-No Net" (solid, remove dead copper, pour order 2): 2,1968.5 959,1963 959,808 959,793 2054,793 2054,1963 3543.31,1963 3543.31,0 0,0
GND on Bottom Layer "Top Layer-No Net" (solid, remove dead copper, pour order 4): 0,1968.5 959,1968.5 959,793 2054,793 2054,1965 3543.31,1968.5 3543.31,0 0,0

## Keep-outs
Keep-Out Layer:
  the board outline again, w10

## Text inside footprints (layer, text, board x,y; h text height)
J1: Mechanical 13 "PCB END" at 2930.77,1934.68 h19.68 r180
M1: Top Overlay "www.EvertDekker.com" at 1356,1891 h19.68